# Altium PCB vs1003.PcbDoc (part 1 of 2)
Units mil, origin at the board's own origin, x right, y up, seen from the top; angles counter-clockwise.
Board outline 2510 x 1375 mil, 2 copper layers (Top Layer, Bottom Layer); 54 components, 45 nets, 205 pads, 75 vias.
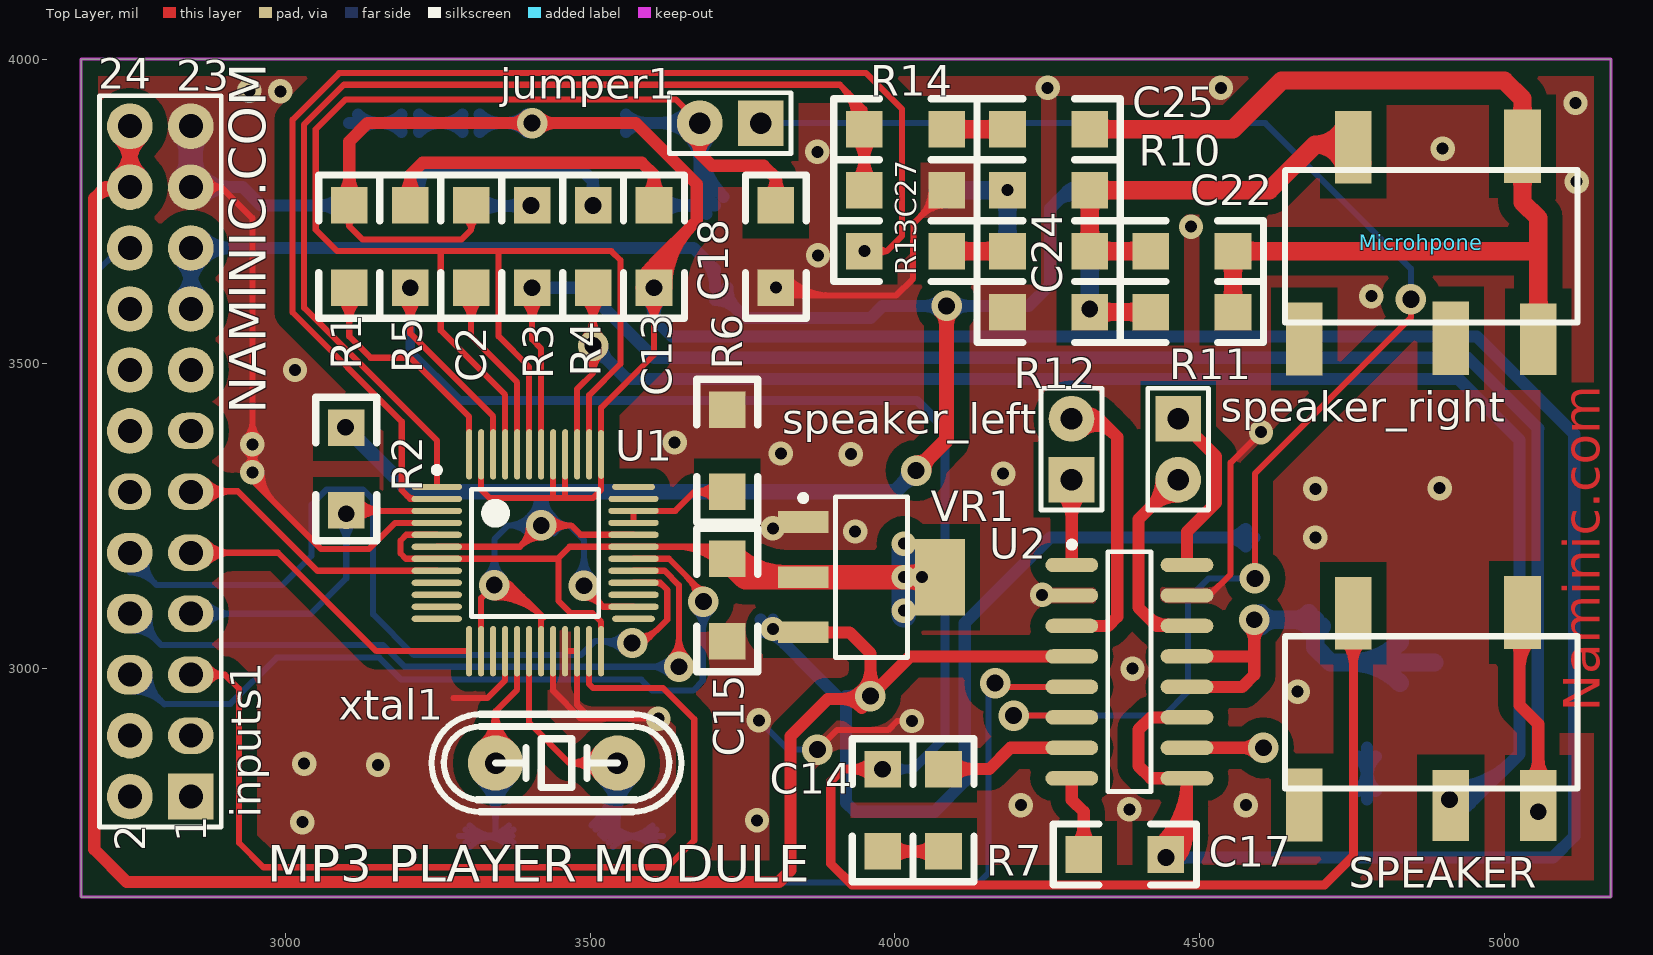
[diagram p0: Top Layer view]
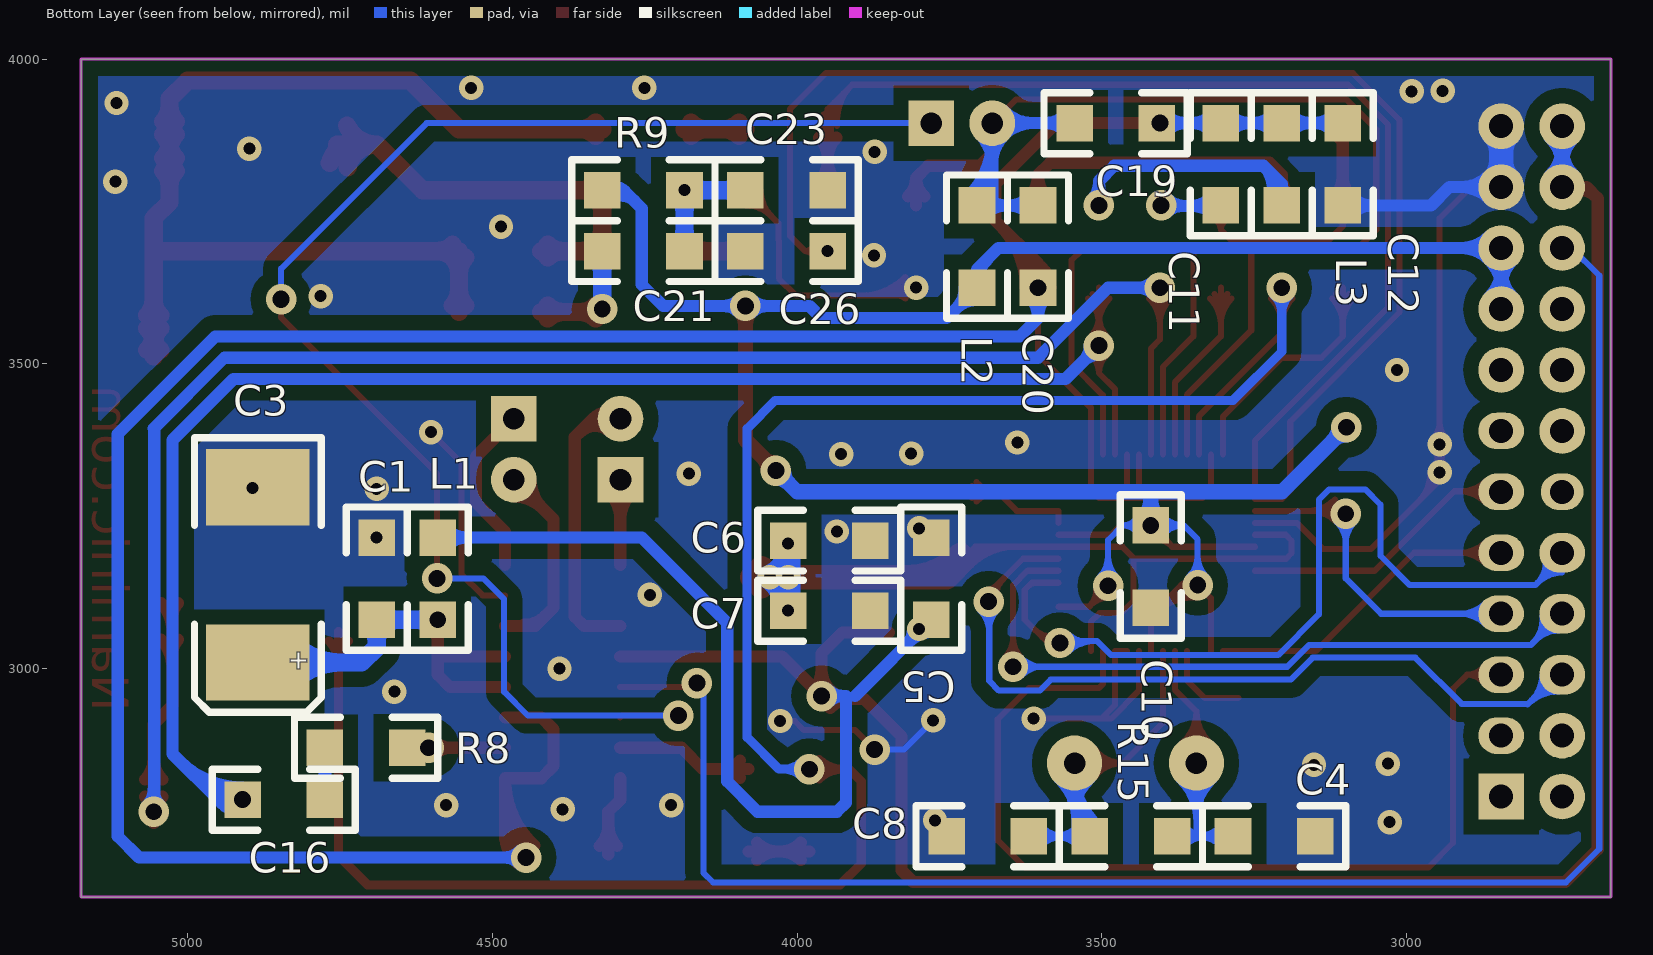
[diagram p1: Bottom Layer view, seen from below]
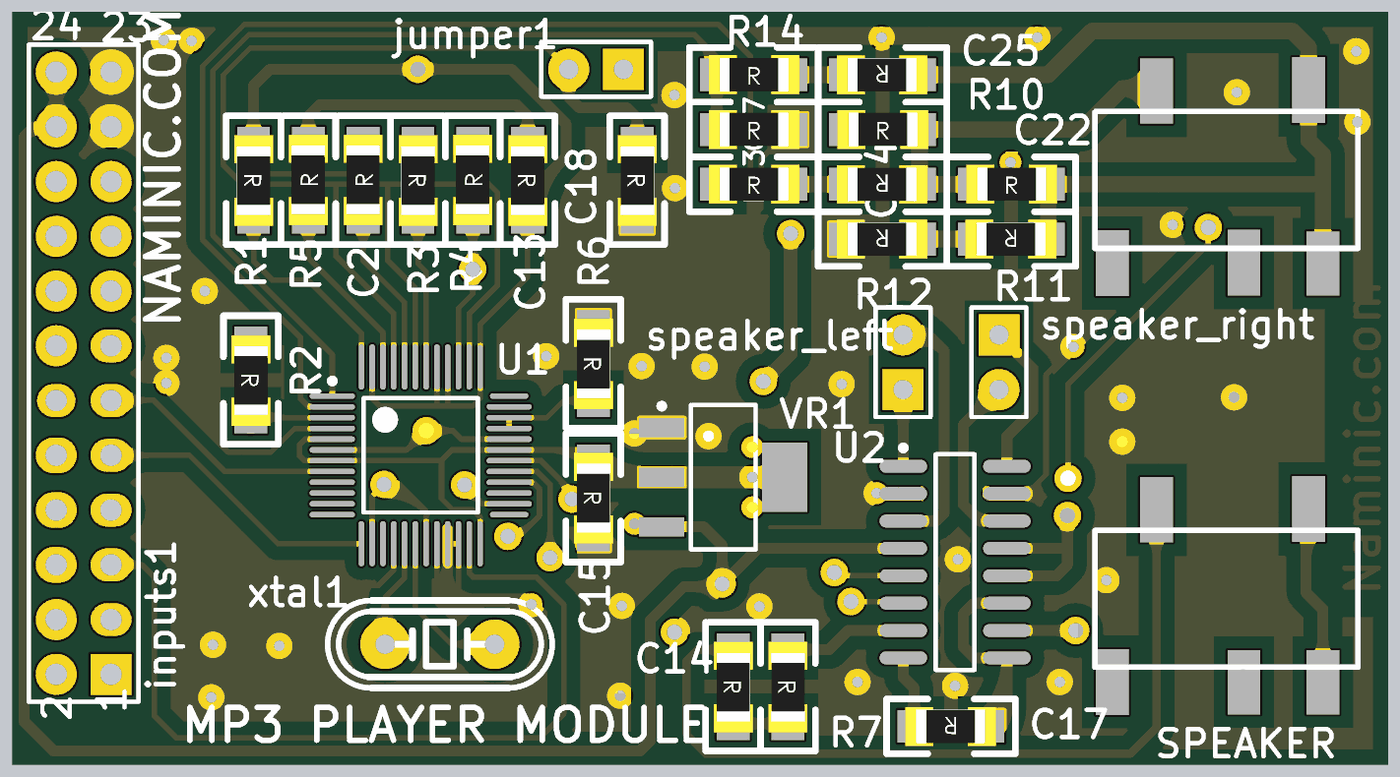
[diagram p3: 3D render of the assembled board from above, using the file's embedded part models]
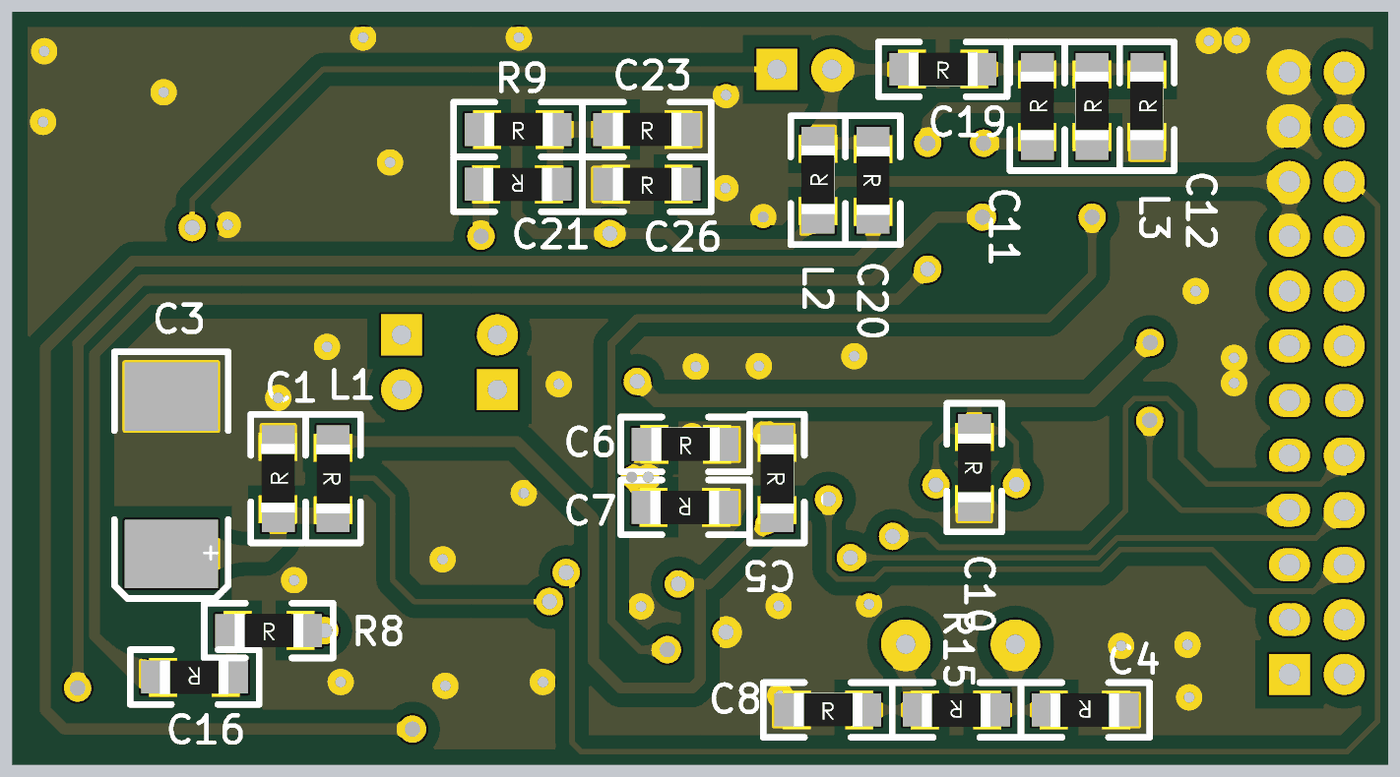
[diagram p4: 3D render of the assembled board from below, using the file's embedded part models]

## Layer stack, top to bottom
Top Layer: signal copper 1.4
Dielectric: dielectric 12.6, FR-4, Dk 4.8
Bottom Layer: signal copper 1.4

## Board outline
2665,2625 2665,4000 5175,4000 5175,2625

## Design rules (kind name [scope] priority, off if disabled: settings)
Clearance PG [(inpoly)] p1: gap=25
Clearance [All] p2: gap=9
ComponentClearance [All] p1 off: gap=10 collisioncheckmode=3 verticalgap=10 showdistances=FALSE
FabricationTestpoint [(IsPad And (OnTopLayer Or OnBottomLayer))] p1: side=3 testpointundercomponent=TRUE minsize=40 maxsize=100 preferedsize=60 minholesize=0 maxholesize=40 preferedholesize=32 testpointgrid=1 allowsidetop=TRUE allowsidebottom=TRUE usegrid=TRUE gridtolerance=0.01
PolygonConnect [All] p1: connectstyle=Direct reliefconductorwidth=20 reliefentries=4 polygonreliefangle="90 Angle"
RoutingVias [All] p1: holewidth=28 width=50 viastyle="Through Hole" minholewidth=28 minwidth=50 maxholewidth=28 maxwidth=50
SilkscreenOverComponentPads [All] p1: minsilkscreentomaskgap=10
SolderMaskExpansion [All] p1: expansion=4
Width [All] p1: maxlimit=100 minlimit=10 preferedwidth=30
25 further rules are at their usual default settings.

## Components (designator, comment, footprint, x,y, rotation, side; value= is the part's Value field where it differs from the comment)
C1 "100nf" 1206 4690,3080 r90 bottom
C2 "10uF" 1206 3305,3625 r90 top
C3 "100uf/10V" "SMD -D" 4885,3010 r270 bottom
C4 "Cap" 1206 3150,2725 r0 bottom
C5 "100nF" 1206 3780,3215 r270 bottom
C6 "10uF" 1206 4015,3210 r180 bottom
C7 "100nF" 1206 3880,3095 r0 bottom
C8 "22PF" 1206 3755,2725 r180 bottom
C10 "100nF" 1206 3420,3235 r270 bottom
C11 "10nF" 1206 3305,3760 r90 bottom
C12 "10nF" 1206 3205,3760 r90 bottom
C13 "10nF" 1206 3605,3760 r270 top
C14 "100nF" 1206 3980,2835 r270 top
C15 "100nF" 1206 3725,3180 r270 top
C16 "100nF" 1206 4775,2785 r0 bottom
C17 "100nF" 1206 4445,2695 r180 top
C18 "100nF" 1206 3805,3760 r270 top
C19 "100nF" 1206 3545,3895 r180 bottom
C20 "10uF" 1206 3605,3760 r270 bottom
C21 "10uF" 1206 4185,3685 r0 bottom
C22 "100nF" 1206 4420,3685 r0 top
C23 "10uF" 1206 4085,3785 r180 bottom
C24 "1uF" 1206 4320,3685 r180 top
C25 "1uF" 1206 4320,3885 r180 top
C26 "100nF" 1206 4085,3685 r180 bottom
C27 "10nF" 1206 3950,3785 r0 top
inputs1 "Header 12X2" HDR2X12 2845,2790 r90 top
jumper1 "Header 2" HDR1X2 3780,3895 r180 top
L1 "100uH" 1206 4590,3215 r270 bottom
L2 "100UH" 1206 3705,3625 r90 bottom
L3 "100UH" 1206 3105,3760 r90 bottom
Microhpone "Microhpone" SPEAKER#1 5030,3820 r180 top
R1 "10K" 1206 3105,3760 r270 top
R2 "10k" 1206 3100,3395 r270 top
R3 "20" 1206 3405,3760 r270 top
R4 "20" 1206 3505,3625 r90 top
R5 "20" 1206 3205,3625 r90 top
R6 "100K" 1206 3725,3425 r270 top
R7 "10K" 1206 4080,2835 r270 top
R8 "10K" 1206 4775,2870 r180 bottom
R9 "1k" 1206 4320,3785 r180 bottom
R10 "1k" 1206 4185,3785 r0 top
R11 "1k" 1206 4555,3585 r180 top
R12 "1k" 1206 4320,3585 r180 top
R13 "470" 1206 3950,3685 r0 top
R14 "470" 1206 3950,3885 r0 top
R15 "1M" 1206 3385,2725 r0 bottom
SPEAKER "Stereo Speaker" SPEAKER#2 5030,3055 r180 top (schematic designator G2_SPEAKER)
speaker_left "Header 2" HDR1X2 4290,3310 r90 top
speaker_right "Header 5" HDR1X2 4465,3410 r270 top
U1 "VS1003" TQFP48_M2 3410,3190 r180 bottom
U2 "PAM8403" 751B-05_N 4385,2995 r0 top
VR1 "AMS1117 2.5" Regolator 3975,3150 r0 top
xtal1 "XTAL" XTAL3 3545,2845 r180 top

## Footprints (in the part's own frame and the unit in brackets; to place one, negate y for a bottom-side part, rotate by r counter-clockwise, add the part's x,y. Pads: shape width x height; smd on the part's side, far side on the other; paste and mask are expansions set on the pad)
751B-05_N [mm] "SOIC, 16-Leads, Body 9.9x3.9mm, Pitch 1.27mm, IPC Medium Density"
  oval 2.2x0.6 smd: 1(-2.4,4.445) 2(-2.4,3.175) 3(-2.4,1.905) 4(-2.4,0.635) 5(-2.4,-0.635) 6(-2.4,-1.905) 7(-2.4,-3.175) 8(-2.4,-4.445) 9(2.4,-4.445) 10(2.4,-3.175) 11(2.4,-1.905) 12(2.4,-0.635) 13(2.4,0.635) 14(2.4,1.905) 15(2.4,3.175) 16(2.4,4.445)
  silkscreen extent -2.52,-5 0.9,5.42, body extent -2,-5 2,5, height 1.75
1206 [mil]
  rect 60x60 smd: 1(0,0) 2(135,0)
  silkscreen extent -50,-50 185,50, body extent -14,-35 151,36, height 25
HDR1X2 [mm] "Connector; Header; 2 Position"
  rect 1.905x1.905 hole 0.9: 1(0,0)
  round 1.905 hole 0.9: 2(2.54,0)
  silkscreen extent -1.27,-1.27 3.81,1.27
HDR2X12 [mm] "Connector; Header; 12x2 Position"
  rect 1.905x1.905 hole 1: 1(0,0)
  round 1.905 hole 1: 2(0,2.54) 4(2.54,2.54) 14(15.24,2.54) 15(17.78,0) 16(17.78,2.54) 17(20.32,0) 18(20.32,2.54) 19(22.86,0) 20(22.86,2.54) 21(25.4,0) 22(25.4,2.54) 23(27.94,0) 24(27.94,2.54)
  oval 1.524x1.905 hole 1: 3(2.54,0) 5(5.08,0) 7(7.62,0) 9(10.16,0) 11(12.7,0) 13(15.24,0)
  oval 1.651x1.905 hole 1: 6(5.08,2.54) 8(7.62,2.54) 10(10.16,2.54)
  oval 1.524x1.778 hole 1: 12(12.7,2.54)
  silkscreen extent -1.27,-1.27 29.21,3.81
Regolator [mm]
  rect 2.1x0.9 smd: 1(-3.18,-2.3) 2(-3.18,2.3) 3(-3.18,0)
  rect 2.1x3.2 smd: 3(2.52,0)
  silkscreen extent -3.3,-3.35 1.17,3.42
"SMD -D" [mil]
  rect 125x170 smd: 1(0,0) 2(-287.4,0)
  silkscreen extent -369,-104 81,104
SPEAKER#1 [mil]
  rect 60x120 smd: 6(358.15,279) R(118,278)
  rect 60x60 smd: G(-26,308) G(-26,251) G(0,-7) G(0,-67) L(277.56,-65) L(277.56,-6)
  silkscreen extent -90,2 390,252
SPEAKER#2 [mil]
  rect 60x120 smd: 6(358.15,279)
  rect 60x60 smd: G(-26,308) G(-26,251) G(0,-7) G(0,-67) L(277.56,-65) L(277.56,-6) R(118,308) R(118,251)
  silkscreen extent -90,2 390,252
TQFP48_M2 [mm] "48-Pin Thin Quad Flat Pack 0.5 mm Pitch, IPC Low Density"
  oval 2.1x0.254 smd far side: 1(4.1,2.75) 2(4.1,2.25) 3(4.1,1.75) 4(4.1,1.25) 5(4.1,0.75) 6(4.1,0.25) 7(4.1,-0.25) 8(4.1,-0.75) 9(4.1,-1.25) 10(4.1,-1.75) 11(4.1,-2.25) 12(4.1,-2.75) 26(-4.1,-2.25) 27(-4.1,-1.75) 28(-4.1,-1.25) 29(-4.1,-0.75) 30(-4.1,-0.25) 31(-4.1,0.25) 32(-4.1,0.75) 33(-4.1,1.25) 34(-4.1,1.75)
  oval 0.254x2.1 smd far side: 13(2.75,-4.1) 14(2.25,-4.1) 15(1.75,-4.1) 16(1.25,-4.1) 17(0.75,-4.1) 18(0.25,-4.1) 19(-0.25,-4.1) 20(-0.75,-4.1) 21(-1.25,-4.1) 22(-1.75,-4.1) 23(-2.25,-4.1) 24(-2.75,-4.1) 38(-2.25,4.1) 39(-1.75,4.1) 40(-1.25,4.1) 41(-0.75,4.1) 42(-0.25,4.1) 43(0.25,4.1) 44(0.75,4.1) 45(1.25,4.1) 46(1.75,4.1) 47(2.25,4.1) 48(2.75,4.1)
  oval 1.778x0.254 smd far side: 25(-4.1,-2.75) 36(-4.1,2.75)
  oval 2.083x0.254 smd far side: 35(-4.1,2.25)
  oval 0.254x2.032 smd far side: 37(-2.75,4.1)
XTAL3 [mm]
  round 2.3 hole 0.9: 1(0,0) 2(5.08,0)
  silkscreen extent -2.67,-2.03 7.75,2.03

## Part data
C1: library part CAP
C2 C6 C20 C21 C23 C24 C25: library part Cap2, "Capacitor"
C3: library part ELECTRO2, "Electrolytic Capacitor"
C4: "Capacitor"
C5 C7 C10 C11 C12 C13 C14 C15 C16 C17 C18 C19 C22 C26 C27: library part "Cap Semi", "Capacitor (Semiconductor SIM Model)"
C8: library part Cap, "Capacitor"
inputs1: "Header, 12-Pin, Dual row"
jumper1 speaker_left: "Header, 2-Pin"
L1: library part INDUCTOR1
L2 L3: library part Inductor, "Inductor"
Microhpone: library part myPhoneJack
R1 R2 R3 R4 R5 R6 R7 R8 R9 R10 R11 R12 R13 R14 R15: library part "Res Semi", "Semiconductor Resistor"
speaker_right: library part "Header 2", "Header, 2-Pin"
VR1: library part "Volt Reg", "Voltage Regulator"
xtal1: "Crystal Oscillator"

## Via types
v1: diameter 40, hole 19.68, Top Layer to Bottom Layer, 45 vias
v2: diameter 50, hole 27.56, Top Layer to Bottom Layer, 25 vias
v3: diameter 50, hole 28, Top Layer to Bottom Layer, 5 vias

## Nets (pads, with @x,y where several pads share a name; then routed paths per layer and width w, separated by ;. In a path a pad name is that pad's centre, name@x,y a point inside that pad or via, vN(x,y) a via of type N, cw(c..) or ccw(c..) an arc to the next point about the centre after c; other vN are vias at no path point)
+2.5: C6.1 C7.2 C15.1 U1.5 U1.7 U1.24 U1.31 VR1.3 | length 2243.6
  Top Layer w10: U1.5@3248.58,3219.53 3198.53,3219.53 3189,3210 3189,3189 3197.84,3180.16 U1.7@3248.58,3180.16 3351,3180.16 3446.84,3180.16 3448,3181.32 ; U1.24@3518.27,3028.58 3518.27,3076.73 3504,3091 3468,3091 3448,3111 3448,3181.32 ; 3640.88,3199.84 cw(c3640.88,3095.88) C15.1@3714.39,3169.39 ; 3665.03,3199.84 cw(c3665.03,3120.03) C15.1@3721.46,3176.46 ; 3689.17,3199.84 cw(c3689.17,3144.17) C15.1@3728.54,3183.54 ; C15.1@3711,3197 3708.16,3199.84 U1.31@3571.42,3199.84 3466.53,3199.84 3448,3181.32
  Top Layer w40: C15.1@3725,3180 3755,3150 VR1.3@3849.8,3150 v1(4015,3150) VR1.3@4074.2,3150 ; C15.1@3732.07,3187.07 ccw(c3821.57,3276.57) VR1.3@3821.57,3150 ; v1@4022.69,3150 cw(c4022.69,3098.48) VR1.3@4059.12,3134.91 ; v1@4022.69,3150 ccw(c4022.69,3201.52) VR1.3@4059.12,3165.09 ; v1@4022.69,3150 cw(c4022.69,3098.48) VR1.3@4059.12,3134.91 ; v1@4022.69,3150 ccw(c4022.69,3201.52) VR1.3@4059.12,3165.09 ; v1@4022.69,3150 cw(c4022.69,3098.48) VR1.3@4059.12,3134.91 ; v1@4022.69,3150 ccw(c4022.69,3201.52) VR1.3@4059.12,3165.09 ; v1@4022.69,3150 cw(c4022.69,3098.48) VR1.3@4059.12,3134.91 ; v1@4022.69,3150 ccw(c4022.69,3201.52) VR1.3@4059.12,3165.09 ; v1@4022.69,3150 cw(c4022.69,3098.48) VR1.3@4059.12,3134.91 ; v1@4022.69,3150 ccw(c4022.69,3201.52) VR1.3@4059.12,3165.09 ; v1@4022.69,3150 cw(c4022.69,3098.48) VR1.3@4059.12,3134.91 ; v1@4022.69,3150 ccw(c4022.69,3201.52) VR1.3@4059.12,3165.09
  Bottom Layer w40: C7.2@4015,3087.35 cw(c4095.41,3087.35) v1(4045,3150) ; v1(4015,3095) v1(4015,3150) C6.1@4015,3195 ; C6.1@4015,3195 ccw(c4063.75,3195) v1(4045,3150) ; C6.1@4015,3195 ccw(c4063.75,3195) v1(4045,3150)
  other v1: 4015,3205
+3.3: C10.1 inputs1.17 inputs1.19 L2.1 R2.1 R9.1 U1.6 U1.14 U1.19 U1.26 U1.32 | length 7859.2
  Top Layer w10: U1.6@3248.58,3199.84 3384.84,3199.84 v2(3420,3235) 3469,3235 3484.47,3219.53 U1.32@3571.42,3219.53 3490.47,3219.53 ; U1.14@3321.42,3028.58 3321.42,3115.42 v2(3343,3137) ; U1.19@3419.84,3028.58 3419.84,3087.16 3370,3137 ; v2(3490,3136) 3490,3133 3521.58,3101.42 U1.26@3571.42,3101.42 ; v2@4085,3585 v2(4085,3595) ; v2(3343,3137) cw(c3343,3071.82) 3389.09,3117.91 ccw(c3343,3071.82) v2(3343,3137) ; v2(3343,3137) 3370,3137 ; 3370,3137 cw(c3370,3145.22) 3362.13,3142.83 ccw(c3370,3145.22) 3370,3137 ; 3370,3137 ccw(c3370,3128.78) 3362.13,3131.17 cw(c3370,3128.78) 3370,3137 ; 3385.86,3200.86 cw(c3420,3166.72) 3420,3215 ccw(c3420,3166.72) 3385.86,3200.86 ; 3385.86,3200.86 ccw(c3351.72,3235) 3400,3235 cw(c3351.72,3235) 3385.86,3200.86 ; 3468.28,3235 cw(c3468.28,3283.28) 3434.14,3249.14 ccw(c3468.28,3283.28) 3468.28,3235 ; 3468.28,3235 ccw(c3468.28,3186.72) 3434.14,3220.86 cw(c3468.28,3186.72) 3468.28,3235 ; v2@3343,3117 cw(c3343,3003.53) 3423.23,3083.77 ccw(c3343,3003.53) v2@3343,3117 ; v2@3343,3127 cw(c3343,3037.67) 3406.16,3100.84 ccw(c3343,3037.67) v2@3343,3127 ; v2@3343,3147 cw(c3343,3105.96) 3372.02,3134.98 ccw(c3343,3105.96) v2@3343,3147 ; v2@3490,3116 cw(c3490,3074.96) 3519.02,3103.98 ccw(c3490,3074.96) v2@3490,3116 ; v2@3509.82,3133.32 ccw(c3545.64,3128.48) 3520.08,3102.92 cw(c3545.64,3128.48) v2@3509.82,3133.32
  Top Layer w25: v2(3099,3396) R2.1@3100,3395 ; v2(4035,3325) 4085,3375 4085,3585 v2(4085,3595) ; 4056.34,3346.34 cw(c4035,3367.68) 4035,3337.5 ccw(c4035,3367.68) 4056.34,3346.34 ; 4056.34,3346.34 ccw(c4077.68,3325) 4047.5,3325 cw(c4077.68,3325) 4056.34,3346.34 ; 4085,3564.82 cw(c4115.18,3564.82) 4093.84,3586.16 ccw(c4115.18,3564.82) 4085,3564.82 ; 4085,3564.82 ccw(c4054.82,3564.82) 4076.16,3586.16 cw(c4054.82,3564.82) 4085,3564.82
  Bottom Layer w10: v2@3328.86,3151.14 ccw(c3294.72,3185.28) 3343,3185.28 ccw(c3391.28,3185.28) v2@3357.14,3151.14 ; v2(3343,3137) 3343,3212 3366,3235 ; v2@3475.86,3150.14 ccw(c3441.72,3184.28) 3490,3184.28 ccw(c3538.28,3184.28) v2@3504.14,3150.14 ; v2(3490,3136) 3490,3211 3466,3235 ; 3366,3235 cw(c3366,3189.19) 3400.94,3218.83 ccw(c3366,3189.19) 3366,3235 ; 3366,3235 ccw(c3366,3280.81) 3400.94,3251.17 cw(c3366,3280.81) 3366,3235 ; 3366,3235 v2(3420,3235) 3466,3235 ; 3371.72,3235 cw(c3371.72,3186.72) 3405.86,3220.86 ccw(c3371.72,3186.72) 3371.72,3235 ; 3371.72,3235 ccw(c3371.72,3283.28) 3405.86,3249.14 cw(c3371.72,3283.28) 3371.72,3235 ; 3387.6,3235 cw(c3387.6,3207.51) 3408.56,3225.3 ccw(c3387.6,3207.51) 3387.6,3235 ; 3387.6,3235 ccw(c3387.6,3262.49) 3408.56,3244.7 cw(c3387.6,3262.49) 3387.6,3235 ; 3466,3235 cw(c3466,3277.9) 3434.63,3248.64 ccw(c3466,3277.9) 3466,3235 ; 3466,3235 ccw(c3466,3192.1) 3434.63,3221.36 cw(c3466,3192.1) 3466,3235 ; 3466,3235 cw(c3466,3264.82) 3440.98,3248.6 ccw(c3466,3264.82) 3466,3235 ; 3466,3235 ccw(c3466,3205.18) 3440.98,3221.4 cw(c3466,3205.18) 3466,3235
  Bottom Layer w20: inputs1.17@2825.55,3609.45 ccw(c2778.61,3656.39) 2845,3656.39 ccw(c2911.39,3656.39) inputs1.17@2864.45,3609.45 ; inputs1.19@2825.55,3670.55 cw(c2778.61,3623.61) 2845,3623.61 cw(c2911.39,3623.61) 2864.45,3670.55 cw(c2911.39,3623.61) 2911.39,3690 cw(c2911.39,3756.39) inputs1.19@2864.45,3709.45 ; inputs1.17@2845,3590 inputs1.19@2845,3690 3670,3690 3705,3655 L2.1@3705,3625 ; L2.1@3705,3605 cw(c3705,3556.72) 3739.14,3590.86 cw(c3773.28,3625) L2.1@3725,3625 ; L2.1@3705,3625 ccw(c3641.74,3628.65) 3686.54,3673.46 cw(c3641.74,3628.65) L2.1@3705,3625 ; L2.1@3705,3625 3755,3575 3960,3575 3980,3595 v2(4085,3595) 4220,3595 4255,3630 4255,3755 4285,3785 ; 4048.79,3595 cw(c4048.79,3558.79) 4074.39,3584.39 ccw(c4048.79,3558.79) 4048.79,3595 ; 4048.79,3595 ccw(c4048.79,3631.21) 4074.39,3605.61 cw(c4048.79,3631.21) 4048.79,3595 ; 4121.21,3595 cw(c4121.21,3631.21) 4095.61,3605.61 ccw(c4121.21,3631.21) 4121.21,3595 ; 4121.21,3595 ccw(c4121.21,3558.79) 4095.61,3584.39 cw(c4121.21,3558.79) 4121.21,3595 ; 4285,3785 cw(c4285,3764.38) 4302.77,3774.85 ccw(c4285,3764.38) 4285,3785 ; 4285,3785 ccw(c4285,3805.62) 4302.77,3795.15 cw(c4285,3805.62) 4285,3785 ; 4285,3785 R9.1@4320,3785 ; R9.1@4320,3785 ccw(c4312.22,3720.88) 4266.55,3766.55 cw(c4312.22,3720.88) R9.1@4320,3785 ; R9.1@4320,3785 ccw(c4302.6,3763.69) 4283.14,3783.14 cw(c4302.6,3763.69) R9.1@4320,3785 ; 4267.5,3767.5 cw(c4288.54,3746.47) 4307.35,3769.51 ccw(c4288.54,3746.47) 4267.5,3767.5
  Bottom Layer w25: v2(3099,3396) 3205,3290 3421,3290 ; v2(3420,3235) 3420,3289 3421,3290 ; 3720,3290 3835,3290 ; v2(4035,3325) 4000,3290 3835,3290 ; 3120.34,3374.66 cw(c3141.68,3396) 3111.5,3396 ccw(c3141.68,3396) 3120.34,3374.66 ; 3120.34,3374.66 ccw(c3099,3353.32) 3099,3383.5 cw(c3099,3353.32) 3120.34,3374.66 ; 3420,3265.18 cw(c3389.82,3265.18) 3411.16,3243.84 ccw(c3389.82,3265.18) 3420,3265.18 ; 3420,3265.18 ccw(c3450.18,3265.18) 3428.84,3243.84 cw(c3450.18,3265.18) 3420,3265.18 ; 3420,3277.25 cw(c3377.75,3277.25) 3407.63,3247.37 ccw(c3377.75,3277.25) 3420,3277.25 ; 3420,3277.25 ccw(c3462.25,3277.25) 3432.37,3247.37 cw(c3462.25,3277.25) 3420,3277.25 ; 3421,3290 3493,3290 3835,3290 ; 4013.66,3303.66 cw(c4035,3282.32) 4035,3312.5 ccw(c4035,3282.32) 4013.66,3303.66 ; 4013.66,3303.66 ccw(c3992.32,3325) 4022.5,3325 cw(c3992.32,3325) 4013.66,3303.66
+5: C5.2 inputs1.22 inputs1.24 L1.1 U2.4 VR1.1 | length 6477.5
  Top Layer w20: 2686.5,2968.17 2686.5,2935 ; 2686.5,3269.2 2686.5,3240 ; inputs1.22@2725.55,3809.45 ccw(c2678.61,3856.39) 2745,3856.39 ccw(c2811.39,3856.39) inputs1.22@2764.45,3809.45 ; inputs1.24@2725.55,3870.55 cw(c2678.61,3823.61) 2745,3823.61 cw(c2811.39,3823.61) inputs1.24@2764.45,3870.55 ; inputs1.24@2745,3890 inputs1.22@2745,3790 2705,3790 2686.5,3771.5 2686.5,3240 ; VR1.1@3849.8,3059.45 3925.55,3059.45 3960,3025 v2(3960,2955) ; U2.4@4290.51,3020 4025,3020 v2(3960,2955) ; 2686.5,2935 2686.5,3240 ; 2686.5,2935 2686.5,2703.5 2740,2650 3810,2650 3829,2669 3829,2889 3890,2950 3960,2950 v2(3960,2955) ; 3892.05,3059.45 cw(c3892.05,3078.08) 3878.87,3064.9 ccw(c3892.05,3078.08) 3892.05,3059.45 ; 3892.05,3059.45 ccw(c3892.05,3040.82) 3878.87,3053.99 cw(c3892.05,3040.82) 3892.05,3059.45 ; 3911.72,2950 ccw(c3911.72,3003.28) v2@3949.39,2965.61 ; 3911.72,2950 cw(c3911.72,2901.72) 3945.86,2935.86 ccw(c3911.72,2901.72) 3911.72,2950 ; 3911.72,2950 ccw(c3911.72,2998.28) v2@3945.86,2964.14 ; 3911.72,2950 ccw(c3911.72,3003.28) v2@3949.39,2965.61 ; 3911.72,2950 ccw(c3911.72,2998.28) v2@3945.86,2964.14 ; v2@3945.86,2964.14 ccw(c3911.72,2998.28) 3960,2998.28 ; v2@3945.86,2964.14 ccw(c3911.72,2998.28) 3960,2998.28 ; v2@3949.39,2965.61 ccw(c3923.79,2991.21) 3960,2991.21 ; v2@3949.39,2965.61 ccw(c3923.79,2991.21) 3960,2991.21 ; 3960,2991.21 ccw(c3996.21,2991.21) 3970.61,2965.61 cw(c3996.21,2991.21) 3960,2991.21 ; 3960,2998.28 ccw(c4008.28,2998.28) 3974.14,2964.14 cw(c4008.28,2998.28) 3960,2998.28 ; 2687.48,3772.48 cw(c2722.65,3737.3) 2742.07,3783.1 ccw(c2722.65,3737.3) 2687.48,3772.48
  Bottom Layer w20: inputs1.22@2725.55,3809.45 ccw(c2678.61,3856.39) 2745,3856.39 ccw(c2811.39,3856.39) inputs1.22@2764.45,3809.45 ; inputs1.24@2725.55,3870.55 cw(c2678.61,3823.61) 2745,3823.61 cw(c2811.39,3823.61) inputs1.24@2764.45,3870.55 ; inputs1.22@2745,3790 inputs1.24@2745,3890 ; C5.2@3780,3080 3905,2955 ; v2(3960,2955) 3920,2955 3920,2780 3935,2765 4065,2765 4115,2815 4115,3075 4255,3215 L1.1@4590,3215 ; 3814.14,3045.86 cw(c3848.28,3080) 3800,3080 ccw(c3848.28,3080) 3814.14,3045.86 ; 3814.14,3045.86 ccw(c3780,3011.72) 3780,3060 cw(c3780,3011.72) 3814.14,3045.86 ; 3923.79,2955 cw(c3923.79,2918.79) 3949.39,2944.39 ccw(c3923.79,2918.79) 3923.79,2955 ; 3923.79,2955 ccw(c3923.79,2991.21) 3949.39,2965.61 cw(c3923.79,2991.21) 3923.79,2955 ; 4541.72,3215 cw(c4541.72,3166.72) 4575.86,3200.86 ccw(c4541.72,3166.72) 4541.72,3215 ; 4541.72,3215 ccw(c4541.72,3263.28) 4575.86,3229.14 cw(c4541.72,3263.28) 4541.72,3215 ; v1@3810,3065 ccw(c3846.21,3065) 3820.61,3039.39 cw(c3846.21,3065) v1@3810,3065
  other v1: 3800,3065
AGND: C2.2 C11.2 C12.2 C13.2 C17.1 C19.2 C20.2 L3.2 R1.1 U1.37 U1.40 U1.41 U1.47 U2.9 U2.11 | length 9287.6
  Top Layer w10: R1.1@3105,3760 3105,3726 ; U1.47@3321.42,3351.42 3321.42,3293.58 3335,3280 3460,3280 ; 3439.53,3280.47 U1.41@3439.53,3351.42 ; U1.40@3459.21,3351.42 3459.21,3280.79 3460,3280 ; C13.2@3587.32,3607.32 cw(c3544.64,3564.64) 3605,3564.64 cw(c3665.36,3564.64) C13.2@3622.68,3607.32 ; C13.2@3594.39,3614.39 cw(c3568.79,3588.79) 3605,3588.79 cw(c3641.21,3588.79) C13.2@3615.61,3614.39 ; v2(3605,3625) 3605,3515 3518.27,3428.27 U1.37@3518.27,3351.42 3518.27,3293.27 3505,3280 3460,3280 ; R1.1@3097.55,3736.14 cw(c3094.38,3726) 3105,3726 ; R1.1@3097.55,3736.14 cw(c3094.38,3726) 3105,3726 ; R1.1@3097.55,3736.14 cw(c3094.38,3726) 3105,3726 ; R1.1@3097.55,3736.14 cw(c3094.38,3726) 3105,3726 ; 3105,3726 cw(c3115.62,3726) R1.1@3112.45,3736.14 ; 3105,3726 cw(c3115.62,3726) R1.1@3112.45,3736.14 ; 3105,3726 cw(c3115.62,3726) R1.1@3112.45,3736.14 ; 3105,3726 cw(c3115.62,3726) R1.1@3112.45,3736.14 ; 3105,3726 3127,3704 3289,3704 3305,3720 ; 3305,3720 cw(c3324.5,3720) 3315.95,3737.53 ccw(c3324.5,3720) 3305,3720 ; 3305,3720 ccw(c3285.5,3720) 3294.05,3737.53 cw(c3285.5,3720) 3305,3720 ; 3305,3720 C2.2@3305,3760 3305,3725 ; 3305,3725 cw(c3317,3725) 3313.11,3736.35 ccw(c3317,3725) 3305,3725 ; 3305,3725 ccw(c3293,3725) 3296.89,3736.35 cw(c3293,3725) 3305,3725 ; 3605,3576.72 cw(c3653.28,3576.72) 3619.14,3610.86 ccw(c3653.28,3576.72) 3605,3576.72 ; 3605,3576.72 ccw(c3556.72,3576.72) 3590.86,3610.86 cw(c3556.72,3576.72) 3605,3576.72
  Top Layer w20: R1.1@3105,3760 3105,3865 3135,3895 v2(3405,3895) 3575,3895 3675,3795 3675,3735 3605,3665 ; C13.2@3585,3625 cw(c3633.28,3625) 3599.14,3659.14 ; C13.2@3625,3625 cw(c3769.85,3625) 3667.43,3727.43 ; 3633.28,3693.28 ccw(c3701.57,3625) v2(3605,3625) 3605,3665 ; v2(4445,2690) C17.1@4445,2695 ; U2.11@4479.49,2920 4420,2920 4400,2900 4400,2840 4420,2820 U2.9@4479.49,2820 ; 3105,3808.28 cw(c3056.72,3808.28) 3090.86,3774.14 ccw(c3056.72,3808.28) 3105,3808.28 ; 3105,3808.28 ccw(c3153.28,3808.28) 3119.14,3774.14 cw(c3153.28,3808.28) 3105,3808.28 ; 3368.79,3895 cw(c3368.79,3858.79) 3394.39,3884.39 ccw(c3368.79,3858.79) 3368.79,3895 ; 3368.79,3895 ccw(c3368.79,3931.21) 3394.39,3905.61 cw(c3368.79,3931.21) 3368.79,3895 ; 3441.21,3895 cw(c3441.21,3931.21) 3415.61,3905.61 ccw(c3441.21,3931.21) 3441.21,3895 ; 3441.21,3895 ccw(c3441.21,3858.79) 3415.61,3884.39 cw(c3441.21,3858.79) 3441.21,3895 ; 3605,3661.21 cw(c3568.79,3661.21) 3594.39,3635.61 ccw(c3568.79,3661.21) 3605,3661.21 ; 3605,3661.21 ccw(c3641.21,3661.21) 3615.61,3635.61 cw(c3641.21,3661.21) 3605,3661.21 ; 3605,3665 cw(c3575,3665) 3593,3641 ccw(c3575,3665) 3605,3665 ; 3605,3665 ccw(c3635,3665) 3617,3641 cw(c3635,3665) 3605,3665 ; C17.1@4445,2695 ccw(c4371.5,2774.11) 4479.49,2774.11 cw(c4371.5,2774.11) C17.1@4445,2695 ; C17.1@4445,2695 4479.49,2729.49 U2.9@4479.49,2820 ; 4479.14,2729.14 cw(c4445,2763.28) 4445,2715 ccw(c4445,2763.28) 4479.14,2729.14 ; 4479.14,2729.14 ccw(c4513.28,2695) 4465,2695 cw(c4513.28,2695) 4479.14,2729.14 ; U2.9@4479.49,2820 cw(c4328.88,2819.99) 4431.39,2709.65 ccw(c4328.88,2819.99) U2.9@4479.49,2820 ; C17.1@4445,2705 ccw(c4445,2729.14) 4462.07,2712.07 cw(c4445,2729.14) C17.1@4445,2705 ; C17.1@4458.61,2680.35 ccw(c4414.12,2728.24) 4479.49,2728.24 cw(c4414.12,2728.24) C17.1@4458.61,2680.35 ; C17.1@4460,2690 cw(c4508.28,2690) 4474.14,2724.14 ccw(c4508.28,2690) C17.1@4460,2690
  Bottom Layer w20: L3.2@3105,3895 C12.2@3205,3895 C11.2@3305,3895 v2(3405,3895) C19.2@3410,3895 ; v2(3605,3625) 3605,3575 3635,3545 4955,3545 5115,3385 5115,2725 5080,2690 v2(4445,2690) ; 3153.28,3895 cw(c3153.28,3943.28) 3119.14,3909.14 ccw(c3153.28,3943.28) 3153.28,3895 ; 3153.28,3895 ccw(c3153.28,3846.72) 3119.14,3880.86 cw(c3153.28,3846.72) 3153.28,3895 ; 3156.72,3895 cw(c3156.72,3846.72) 3190.86,3880.86 ccw(c3156.72,3846.72) 3156.72,3895 ; 3156.72,3895 ccw(c3156.72,3943.28) 3190.86,3909.14 cw(c3156.72,3943.28) 3156.72,3895 ; 3253.28,3895 cw(c3253.28,3943.28) 3219.14,3909.14 ccw(c3253.28,3943.28) 3253.28,3895 ; 3253.28,3895 ccw(c3253.28,3846.72) 3219.14,3880.86 cw(c3253.28,3846.72) 3253.28,3895 ; 3256.72,3895 cw(c3256.72,3846.72) 3290.86,3880.86 ccw(c3256.72,3846.72) 3256.72,3895 ; 3256.72,3895 ccw(c3256.72,3943.28) 3290.86,3909.14 cw(c3256.72,3943.28) 3256.72,3895 ; 3353.28,3895 cw(c3353.28,3943.28) 3319.14,3909.14 ccw(c3353.28,3943.28) 3353.28,3895 ; 3353.28,3895 ccw(c3353.28,3846.72) 3319.14,3880.86 cw(c3353.28,3846.72) 3353.28,3895 ; 3361.72,3895 cw(c3361.72,3846.72) 3395.86,3880.86 ccw(c3361.72,3846.72) 3361.72,3895 ; 3361.72,3895 ccw(c3361.72,3943.28) 3395.86,3909.14 cw(c3361.72,3943.28) 3361.72,3895 ; 3368.79,3895 cw(c3368.79,3858.79) 3394.39,3884.39 ccw(c3368.79,3858.79) 3368.79,3895 ; 3368.79,3895 ccw(c3368.79,3931.21) 3394.39,3905.61 cw(c3368.79,3931.21) 3368.79,3895 ; 3605,3576.72 cw(c3653.28,3576.72) 3619.14,3610.86 ccw(c3653.28,3576.72) 3605,3576.72 ; 3605,3576.72 ccw(c3556.72,3576.72) 3590.86,3610.86 cw(c3556.72,3576.72) 3605,3576.72 ; 3605,3588.79 cw(c3641.21,3588.79) 3615.61,3614.39 ccw(c3641.21,3588.79) 3605,3588.79 ; 3605,3588.79 ccw(c3568.79,3588.79) 3594.39,3614.39 cw(c3568.79,3588.79) 3605,3588.79 ; 4481.21,2690 cw(c4481.21,2726.21) 4455.61,2700.61 ccw(c4481.21,2726.21) 4481.21,2690 ; 4481.21,2690 ccw(c4481.21,2653.79) 4455.61,2679.39 cw(c4481.21,2653.79) 4481.21,2690
AVDD: C18.1 C19.1 C20.1 jumper1.2 L2.2 U1.38 U1.43 U1.45 | length 4272.9
  Top Layer w10: U1.45@3360.79,3351.42 3360.79,3449.21 3255,3555 3255,3685 ; U1.43@3400.16,3351.42 3400.16,3494.84 3350,3545 3350,3685 ; U1.38@3498.58,3351.42 3498.58,3448.58 3550,3500 3550,3605 ; 3550,3570 3550,3605 ; jumper1.2@3680,3895 3641,3934 3099,3934 3050,3885 3050,3720 3085,3685 3255,3685 ; 3255,3685 3350,3685 ; 3350,3685 3535,3685 3550,3670 3550,3605
  Top Layer w20: jumper1.2@3680,3895 3680,3845 ; C18.1@3805,3760 3805,3805 ; 3680,3845 cw(c3711.7,3845) 3694.73,3871.77 ccw(c3711.7,3845) 3680,3845 ; 3680,3845 ccw(c3648.3,3845) 3665.27,3871.77 cw(c3648.3,3845) 3680,3845 ; 3680,3845 3700,3825 3785,3825 3805,3805 ; 3805,3805 cw(c3764.38,3805) 3791.6,3774.85 ccw(c3764.38,3805) 3805,3805 ; 3805,3805 ccw(c3845.62,3805) 3818.4,3774.85 cw(c3845.62,3805) 3805,3805
  Bottom Layer w20: C19.1@3555,3895 jumper1.2@3680,3895 3680,3765 L2.2@3685,3760 ; C20.1@3595,3765 3600,3760 C20.1@3605,3760 L2.2@3685,3760 ; jumper1.2@3660.55,3914.45 cw(c3613.61,3961.39) 3613.61,3895 cw(c3613.61,3828.61) jumper1.2@3660.55,3875.55 ; 3680,3820.36 ccw(c3765.36,3820.36) L2.2@3705,3760 L2.2@3685,3760 ; jumper1.2@3680,3868.64 ccw(c3813.64,3868.64) L2.2@3719.14,3774.14 ; 3593.28,3895 cw(c3593.28,3943.28) 3559.14,3909.14 ccw(c3593.28,3943.28) 3593.28,3895 ; 3593.28,3895 ccw(c3593.28,3846.72) 3559.14,3880.86 cw(c3593.28,3846.72) 3593.28,3895 ; 3653.28,3760 cw(c3653.28,3808.28) 3619.14,3774.14 ccw(c3653.28,3808.28) 3653.28,3760 ; 3653.28,3760 ccw(c3653.28,3711.72) 3619.14,3745.86 cw(c3653.28,3711.72) 3653.28,3760 ; 3656.72,3760 cw(c3656.72,3711.72) 3690.86,3745.86 ccw(c3656.72,3711.72) 3656.72,3760 ; 3656.72,3760 ccw(c3656.72,3808.28) 3690.86,3774.14 cw(c3656.72,3808.28) 3656.72,3760 ; jumper1.2@3660.55,3875.55 cw(c3613.61,3828.61) 3680,3828.61 ; jumper1.2@3660.55,3875.55 cw(c3613.61,3828.61) 3680,3828.61 ; 3680,3828.61 cw(c3746.39,3828.61) 3699.45,3875.55 ccw(c3746.39,3828.61) 3680,3828.61
CLK: inputs1.10 U1.28 | length 1859.8
  Top Layer w10: v2@3570.39,3051.9 ccw(c3577.33,3101.26) 3612.57,3066.02 ; U1.28@3571.42,3140.79 3615.21,3140.79 3626.76,3129.24 3626.76,3080.2 3588.56,3042 v2(3569,3042) ccw(c3573.83,3076.39) 3598.39,3051.83 ; U1.28@3607.76,3140.79 cw(c3609.62,3127.74) 3618.94,3137.06 ccw(c3609.62,3127.74) U1.28@3607.76,3140.79 ; U1.28@3607.76,3140.79 cw(c3607.76,3122.79) 3620.48,3135.52 ccw(c3607.76,3122.79) U1.28@3607.76,3140.79
  Bottom Layer w10: 3513.47,3045 cw(c3513.47,2986.47) v2@3554.86,3027.86 ; 3527.96,3045 ccw(c3527.96,3083.04) v2@3554.86,3056.14 ; 3537.62,3045 cw(c3537.62,3010.62) v2@3561.93,3034.93 ; v2(3569,3042) 3569,3044 3568,3045 3508,3045 3485,3022 3211,3022 3144,3089 3144,3277 3127,3294 3068,3294 3043,3269 3043,3185 2995,3137 2789,3137 2785.12,3140.88 ; inputs1.10@2772.09,3174.19 ccw(c2816.65,3172.41) 2785.12,3140.88 ; inputs1.10@2772.09,3174.19 ccw(c2816.65,3172.41) 2785.12,3140.88 ; inputs1.10@2772.09,3174.19 2772.48,3183.91 inputs1.10@2772.09,3174.19 ; 2785.12,3140.88 ccw(c2745,3100.77) 2745,3157.5 cw(c2745,3100.77) 2785.12,3140.88 ; inputs1.10@2745,3167.5 cw(c2745,3134.91) 2768.05,3157.95 ccw(c2745,3134.91) inputs1.10@2745,3167.5 ; inputs1.10@2762.49,3184.3 ccw(c2808.17,3182.49) 2775.84,3150.16 cw(c2808.17,3182.49) inputs1.10@2762.49,3184.3
CS: inputs1.5 U1.23 | length 1638.4
  Top Layer w10: inputs1.5@2845,2990 2901,2990 ; inputs1.5@2872.86,2975.5 cw(c2901,2955.46) 2901,2990 ; inputs1.5@2872.86,3004.5 ccw(c2901,3024.54) 2901,2990 ; U1.23@3498.58,3028.58 3498.58,2974.42 3505,2968 3620,2968 3671,2917 3671,2779 3671,2718 3627,2674 2964,2674 2924,2714 2924,2967 2901,2990
DCS: inputs1.9 U1.13 | length 675.3
  Top Layer w10: inputs1.9@2845,3190 2988,3190 3149.42,3028.58 U1.13@3301.73,3028.58 ; inputs1.9@2863.11,3179.39 cw(c2888.71,3153.79) 2888.71,3190 cw(c2888.71,3226.21) inputs1.9@2863.11,3200.61 ; inputs1.9@2870.18,3172.32 cw(c2912.86,3129.64) 2912.86,3190 cw(c2912.86,3250.36) inputs1.9@2870.18,3207.68
GBUF: R3.2 SPEAKER.G U1.42 | length 4934.1
  Top Layer w10: v2(3405,3625) 3405,3540 3419.84,3525.16 U1.42@3419.84,3351.42 ; 3405,3564.64 cw(c3465.36,3564.64) 3422.68,3607.32 ccw(c3465.36,3564.64) 3405,3564.64 ; 3405,3564.64 ccw(c3344.64,3564.64) 3387.32,3607.32 cw(c3344.64,3564.64) 3405,3564.64 ; 3405,3576.72 cw(c3453.28,3576.72) 3419.14,3610.86 ccw(c3453.28,3576.72) 3405,3576.72 ; 3405,3576.72 ccw(c3356.72,3576.72) 3390.86,3610.86 cw(c3356.72,3576.72) 3405,3576.72 ; 3405,3588.79 cw(c3441.21,3588.79) 3415.61,3614.39 ccw(c3441.21,3588.79) 3405,3588.79 ; 3405,3588.79 ccw(c3368.79,3588.79) 3394.39,3614.39 cw(c3368.79,3588.79) 3405,3588.79
  Top Layer w20: SPEAKER.G@5025,3085 5025,2940 5056,2909 SPEAKER.G@5056,2804 SPEAKER.G@5056,2747 v2(5056,2765) ; SPEAKER.G@5015.86,3107.86 cw(c4993.79,3085.79) SPEAKER.G@5025,3085.79 ; SPEAKER.G@5015.86,3107.86 cw(c4993.79,3085.79) SPEAKER.G@5025,3085.79 ; SPEAKER.G@5015.86,3107.86 cw(c4993.79,3085.79) SPEAKER.G@5025,3085.79 ; SPEAKER.G@5015.86,3107.86 cw(c4993.79,3085.79) SPEAKER.G@5025,3085.79 ; SPEAKER.G@5041.86,2789.86 cw(c5007.72,2755.72) SPEAKER.G@5056,2755.72 ; SPEAKER.G@5041.86,2789.86 cw(c5007.72,2755.72) SPEAKER.G@5056,2755.72 ; SPEAKER.G@5041.86,2789.86 cw(c5007.72,2755.72) SPEAKER.G@5056,2755.72 ; SPEAKER.G@5041.86,2789.86 cw(c5007.72,2755.72) SPEAKER.G@5056,2755.72 ; SPEAKER.G@5056,2755.72 cw(c5104.28,2755.72) SPEAKER.G@5070.14,2789.86 ; SPEAKER.G@5056,2755.72 cw(c5104.28,2755.72) SPEAKER.G@5070.14,2789.86 ; SPEAKER.G@5056,2755.72 cw(c5104.28,2755.72) SPEAKER.G@5070.14,2789.86 ; SPEAKER.G@5056,2755.72 cw(c5104.28,2755.72) SPEAKER.G@5070.14,2789.86 ; v2(5056,2765) cw(c5084.02,2765) 5067.67,2787.76 ccw(c5084.02,2765) v2(5056,2765) ; v2(5056,2765) ccw(c5027.98,2765) 5044.33,2787.76 cw(c5027.98,2765) v2(5056,2765) ; SPEAKER.G@5056,2795.28 cw(c5007.72,2795.28) 5041.86,2761.14 ccw(c5007.72,2795.28) SPEAKER.G@5056,2795.28 ; SPEAKER.G@5056,2795.28 ccw(c5104.28,2795.28) 5070.14,2761.14 cw(c5104.28,2795.28) SPEAKER.G@5056,2795.28 ; SPEAKER.G@5056,2801.21 cw(c5019.79,2801.21) 5045.39,2775.61 ccw(c5019.79,2801.21) SPEAKER.G@5056,2801.21 ; SPEAKER.G@5056,2801.21 ccw(c5092.21,2801.21) 5066.61,2775.61 cw(c5092.21,2801.21) SPEAKER.G@5056,2801.21 ; 5056,2852.28 cw(c5007.72,2852.28) 5041.86,2818.14 ccw(c5007.72,2852.28) 5056,2852.28 ; 5056,2852.28 ccw(c5104.28,2852.28) 5070.14,2818.14 cw(c5104.28,2852.28) 5056,2852.28 ; SPEAKER.G@5015.86,3047.86 cw(c4993.79,3025.79) 5025,3025.79 ccw(c4993.79,3025.79) SPEAKER.G@5015.86,3047.86 ; 5025,3001.64 cw(c5090.36,3001.64) 5044.14,3047.86 ccw(c5090.36,3001.64) 5025,3001.64 ; SPEAKER.G@5025,3061.64 cw(c5090.36,3061.64) 5044.14,3107.86 ccw(c5090.36,3061.64) SPEAKER.G@5025,3061.64 ; SPEAKER.G@5025,3084.67 cw(c5045.38,3084.67) 5037.62,3103.51 ccw(c5045.38,3084.67) SPEAKER.G@5025,3084.67
  Bottom Layer w20: v2(3405,3625) 3490,3625 3605,3510 4940,3510 5056,3394 ; v2@5055,2765 5055,3394 ; 3441.21,3625 cw(c3441.21,3661.21) 3415.61,3635.61 ccw(c3441.21,3661.21) 3441.21,3625 ; 3441.21,3625 ccw(c3441.21,3588.79) 3415.61,3614.39 cw(c3441.21,3588.79) 3441.21,3625 ; 5056,2801.21 cw(c5019.79,2801.21) 5045.39,2775.61 ccw(c5019.79,2801.21) 5056,2801.21 ; 5056,2801.21 ccw(c5092.21,2801.21) 5066.61,2775.61 cw(c5092.21,2801.21) 5056,2801.21